# EAGLE board Adapter-IO4-test_array (EAGLE 7.7.0)
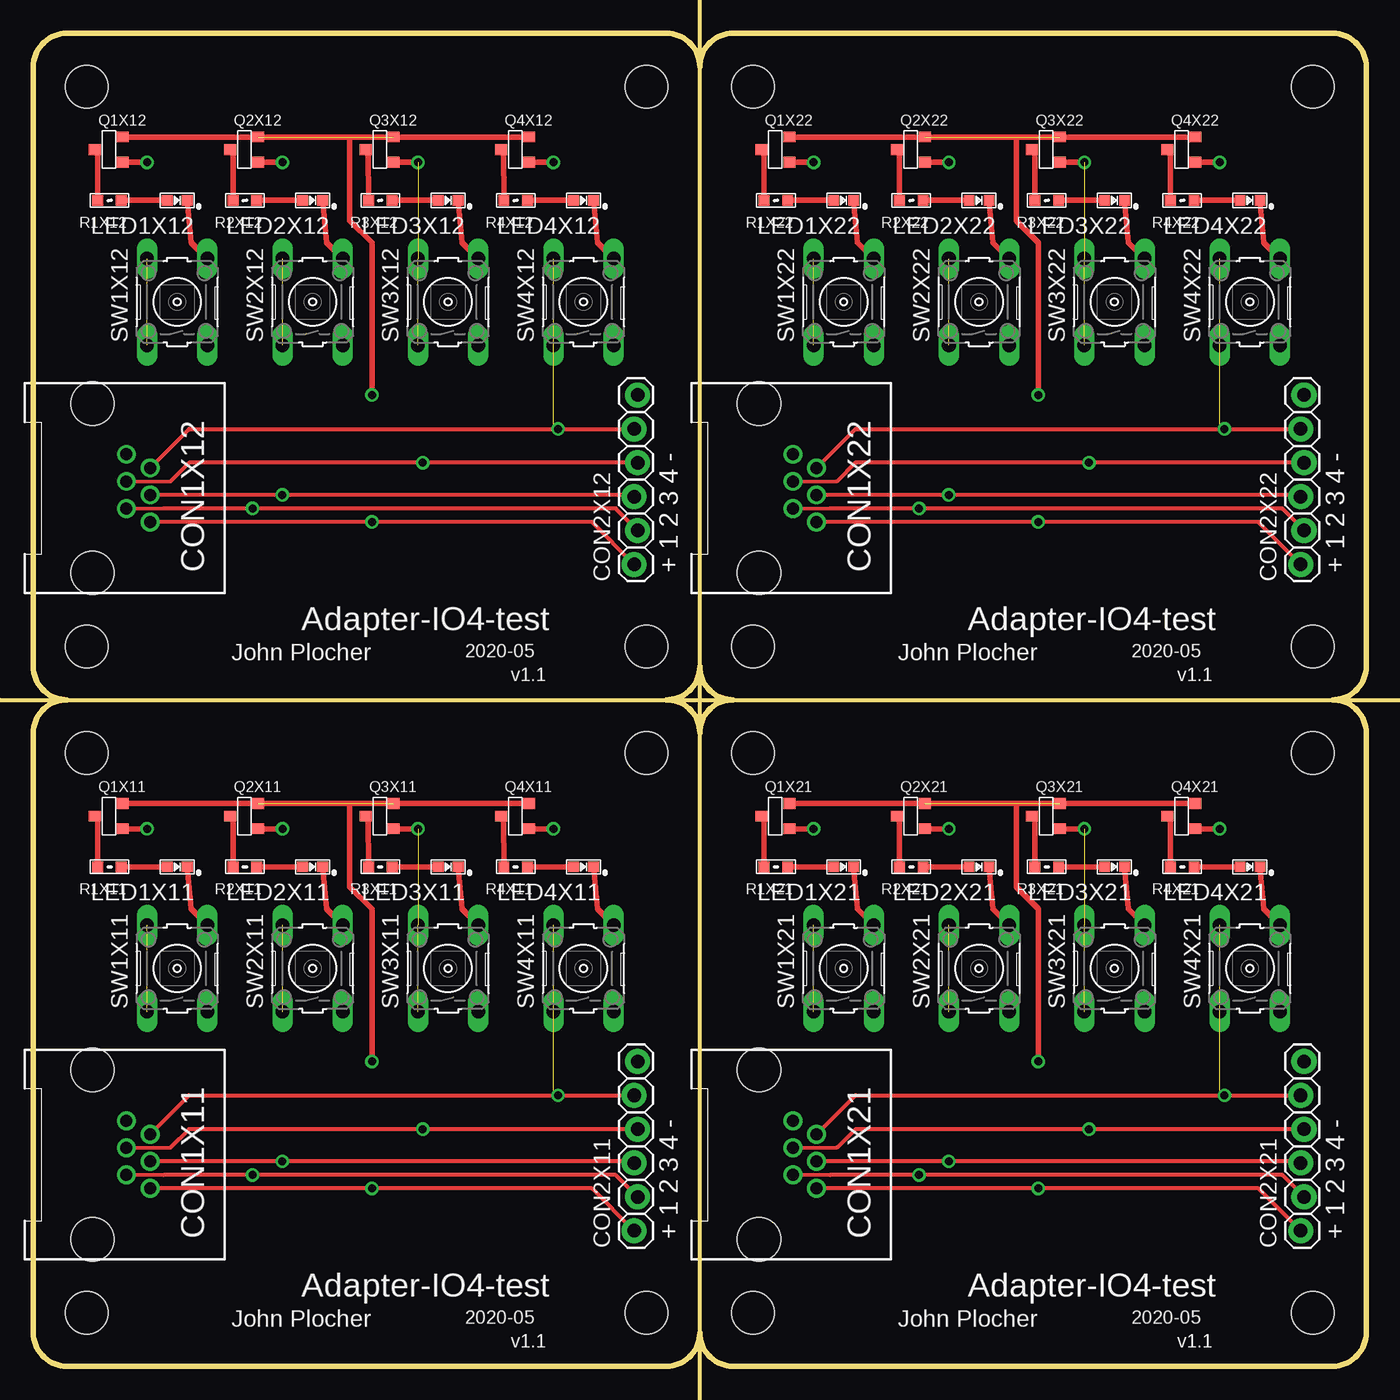
[diagram p0: board, top side]
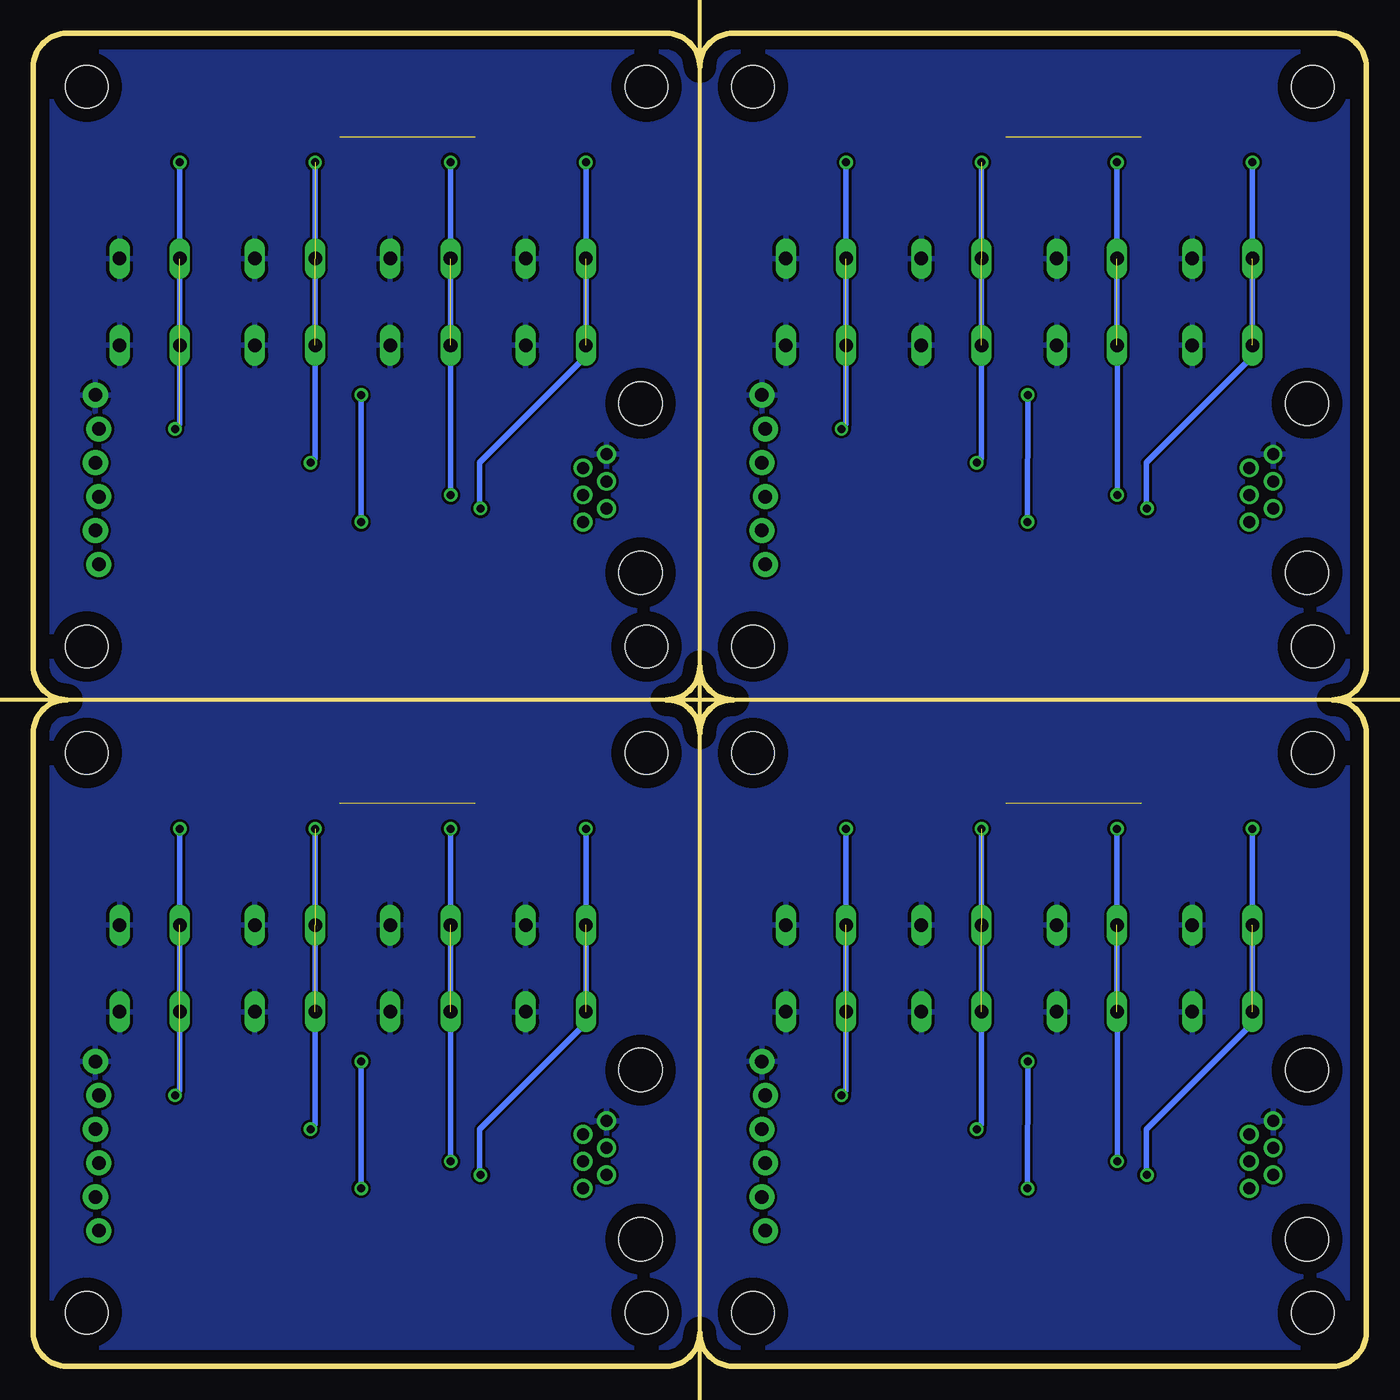
[diagram p1: board, bottom side, seen from below]

Size 100 x 100 mm. Coordinates in mm from the lower left corner, seen from the top.
Outline: 0,2.5 0,47.5 arc-90 2.5,50 arc-90 0,52.5 0,97.5 arc-90 2.5,100 47.5,100 arc-90 50,97.5 arc-90 52.5,100 97.5,100 arc-90 100,97.5 100,52.5 arc-90 97.5,50 arc-90 100,47.5 100,2.5 arc-90 97.5,0 52.5,0 arc-90 50,2.5 arc-90 47.5,0 2.5,0 arc-90 0,2.5
Outline: 50,52.5 arc-90 47.5,50 arc-90 50,47.5 arc-90 52.5,50 arc-90 50,52.5
Copper layers (1*16): Top 0.035mm / dielectric 1.5mm / Bottom 0.035mm
Design rules "default": minimum track width 10mil, minimum drill 0.6mm, track to track 8mil, track to pad 8mil, pad to pad 8mil, via to via 8mil, smd to smd 8mil, copper to edge 40mil, drill to drill 8mil, minimum pad ring 10mil, minimum via ring 8mil, stop-mask expansion 4mil, vias tented up to drill 0mil, thermal gap 10mil
Holes 3.2 mm at 46,46 4,4 46,4 4,46 46,96 4,54 46,54 4,96 96,46 54,4 96,4 54,46 96,96 54,54 96,54 54,96 4,96 46,96 54,96 96,96 96,54 54,54 46,54 4,54 4,46 46,46 54,46 96,46 96,4 54,4 46,4 4,4
Milling: 2 lines

## Footprints (pad centres in the part's own frame; a part is rotated, then mirrored left to right if it is on the bottom)
RJ25-INVERTED = drill 0.9 pad 1.4: 1 2.54,4.318; 2 1.524,2.54; 3 0.508,4.318; 4 -0.508,2.54; 5 -1.524,4.318; 6 -2.54,2.54 | hole 3.251: -6.35,0; 6.35,0
1X06_LOCK = drill 1.016 pad 1.88: 1 0,0; 2 2.54,-0.254; 3 5.08,0; 4 7.62,-0.254; 5 10.16,0; 6 12.7,-0.254
0603-LED = smd 0.8 x 0.8: A 0.75,0; C -0.75,0
SOT23-3 = smd 0.9 x 0.8: 1 1,-0.95; 2 1,0.95; 3 -1.1,0
0603-RES = smd 0.813 x 0.813: 1 -0.889,0; 2 0.889,0
B3F-10XX = drill 1.016 long: 1 -3.251,2.261; 2 3.251,2.261; 3 -3.251,-2.261; 4 3.251,-2.261

## Placement (x,y rotation side)
CON1X11  RJ12/6  [RJ25-INVERTED]  4.45,15.88 270 top
CON1X12  RJ12/6  [RJ25-INVERTED]  4.45,65.88 270 top
CON1X21  RJ12/6  [RJ25-INVERTED]  54.45,15.88 270 top
CON1X22  RJ12/6  [RJ25-INVERTED]  54.45,65.88 270 top
CON2X11  0.100  [1X06_LOCK]  45.09,10.16 90 top
CON2X12  0.100  [1X06_LOCK]  45.09,60.16 90 top
CON2X21  0.100  [1X06_LOCK]  95.08,10.16 90 top
CON2X22  0.100  [1X06_LOCK]  95.08,60.16 90 top
LED1X11  G  [0603-LED]  10.79,37.47 180 top
LED1X12  G  [0603-LED]  10.79,87.47 180 top
LED1X21  G  [0603-LED]  60.8,37.47 180 top
LED1X22  G  [0603-LED]  60.8,87.47 180 top
LED2X11  G  [0603-LED]  20.95,37.47 180 top
LED2X12  G  [0603-LED]  20.95,87.47 180 top
LED2X21  G  [0603-LED]  70.95,37.47 180 top
LED2X22  G  [0603-LED]  70.95,87.47 180 top
LED3X11  G  [0603-LED]  31.11,37.47 180 top
LED3X12  G  [0603-LED]  31.11,87.47 180 top
LED3X21  G  [0603-LED]  81.11,37.47 180 top
LED3X22  G  [0603-LED]  81.11,87.47 180 top
LED4X11  G  [0603-LED]  41.27,37.47 180 top
LED4X12  G  [0603-LED]  41.27,87.47 180 top
LED4X21  G  [0603-LED]  91.28,37.47 180 top
LED4X22  G  [0603-LED]  91.28,87.47 180 top
Q1X11  p-fet  [SOT23-3]  5.71,41.27 0 top
Q1X12  p-fet  [SOT23-3]  5.71,91.28 0 top
Q1X21  p-fet  [SOT23-3]  55.72,41.27 0 top
Q1X22  p-fet  [SOT23-3]  55.72,91.28 0 top
Q2X11  p-fet  [SOT23-3]  15.88,41.27 0 top
Q2X12  p-fet  [SOT23-3]  15.88,91.28 0 top
Q2X21  p-fet  [SOT23-3]  65.88,41.27 0 top
Q2X22  p-fet  [SOT23-3]  65.88,91.28 0 top
Q3X11  p-fet  [SOT23-3]  26.04,41.27 0 top
Q3X12  p-fet  [SOT23-3]  26.04,91.28 0 top
Q3X21  p-fet  [SOT23-3]  76.03,41.27 0 top
Q3X22  p-fet  [SOT23-3]  76.03,91.28 0 top
Q4X11  p-fet  [SOT23-3]  36.2,41.27 0 top
Q4X12  p-fet  [SOT23-3]  36.2,91.28 0 top
Q4X21  p-fet  [SOT23-3]  86.19,41.27 0 top
Q4X22  p-fet  [SOT23-3]  86.19,91.28 0 top
R1X11  2k0  [0603-RES]  5.71,37.47 180 top
R1X12  2k0  [0603-RES]  5.71,87.47 180 top
R1X21  2k0  [0603-RES]  55.72,37.47 180 top
R1X22  2k0  [0603-RES]  55.72,87.47 180 top
R2X11  2k0  [0603-RES]  15.88,37.47 180 top
R2X12  2k0  [0603-RES]  15.88,87.47 180 top
R2X21  2k0  [0603-RES]  65.88,37.47 180 top
R2X22  2k0  [0603-RES]  65.88,87.47 180 top
R3X11  2k0  [0603-RES]  26.04,37.47 180 top
R3X12  2k0  [0603-RES]  26.04,87.47 180 top
R3X21  2k0  [0603-RES]  76.03,37.47 180 top
R3X22  2k0  [0603-RES]  76.03,87.47 180 top
R4X11  2k0  [0603-RES]  36.2,37.47 180 top
R4X12  2k0  [0603-RES]  36.2,87.47 180 top
R4X21  2k0  [0603-RES]  86.19,37.47 180 top
R4X22  2k0  [0603-RES]  86.19,87.47 180 top
SW1X11  SPST-MOM  [B3F-10XX]  10.79,29.84 90 top
SW1X12  SPST-MOM  [B3F-10XX]  10.79,79.84 90 top
SW1X21  SPST-MOM  [B3F-10XX]  60.8,29.84 90 top
SW1X22  SPST-MOM  [B3F-10XX]  60.8,79.84 90 top
SW2X11  SPST-MOM  [B3F-10XX]  20.95,29.84 90 top
SW2X12  SPST-MOM  [B3F-10XX]  20.95,79.84 90 top
SW2X21  SPST-MOM  [B3F-10XX]  70.95,29.84 90 top
SW2X22  SPST-MOM  [B3F-10XX]  70.95,79.84 90 top
SW3X11  SPST-MOM  [B3F-10XX]  31.11,29.84 90 top
SW3X12  SPST-MOM  [B3F-10XX]  31.11,79.84 90 top
SW3X21  SPST-MOM  [B3F-10XX]  81.11,29.84 90 top
SW3X22  SPST-MOM  [B3F-10XX]  81.11,79.84 90 top
SW4X11  SPST-MOM  [B3F-10XX]  41.27,29.84 90 top
SW4X12  SPST-MOM  [B3F-10XX]  41.27,79.84 90 top
SW4X21  SPST-MOM  [B3F-10XX]  91.28,29.84 90 top
SW4X22  SPST-MOM  [B3F-10XX]  91.28,79.84 90 top

## Library data of the parts
CON1X11 CON1X12 CON1X21 CON1X22 CON2X11 CON2X12 CON2X21 CON2X22 LED1X11 LED1X12 LED1X21 LED1X22 LED2X11 LED2X12 LED2X21 LED2X22 LED3X11 LED3X12 LED3X21 LED3X22 LED4X11 LED4X12 LED4X21 LED4X22 Q1X11 Q1X12 Q1X21 Q1X22 Q2X11 Q2X12 Q2X21 Q2X22 Q3X11 Q3X12 Q3X21 Q3X22 Q4X11 Q4X12 Q4X21 Q4X22 R1X11 R1X12 R1X21 R1X22 R2X11 R2X12 R2X21 R2X22 R3X11 R3X12 R3X21 R3X22 R4X11 R4X12 R4X21 R4X22 SW1X11 SW1X12 SW1X21 SW1X22 SW2X11 SW2X12 SW2X21 SW2X22 SW3X11 SW3X12 SW3X21 SW3X22 SW4X11 SW4X12 SW4X21 SW4X22 = SPCoast

## Nets
GNDX11: CON1X11.6 CON2X11.6 LED1X11.C LED2X11.C LED3X11.C LED4X11.C SW1X11.3 SW1X11.4 SW2X11.3 SW2X11.4 SW3X11.3 SW3X11.4 SW4X11.3 SW4X11.4
GNDX12: CON1X12.6 CON2X12.6 LED1X12.C LED2X12.C LED3X12.C LED4X12.C SW1X12.3 SW1X12.4 SW2X12.3 SW2X12.4 SW3X12.3 SW3X12.4 SW4X12.3 SW4X12.4
GNDX21: CON1X21.6 CON2X21.6 LED1X21.C LED2X21.C LED3X21.C LED4X21.C SW1X21.3 SW1X21.4 SW2X21.3 SW2X21.4 SW3X21.3 SW3X21.4 SW4X21.3 SW4X21.4
GNDX22: CON1X22.6 CON2X22.6 LED1X22.C LED2X22.C LED3X22.C LED4X22.C SW1X22.3 SW1X22.4 SW2X22.3 SW2X22.4 SW3X22.3 SW3X22.4 SW4X22.3 SW4X22.4
N$1X11: Q1X11.3 R1X11.2
N$1X12: Q1X12.3 R1X12.2
N$1X21: Q1X21.3 R1X21.2
N$1X22: Q1X22.3 R1X22.2
N$2X11: LED1X11.A R1X11.1
N$2X12: LED1X12.A R1X12.1
N$2X21: LED1X21.A R1X21.1
N$2X22: LED1X22.A R1X22.1
N$3X11: Q2X11.3 R2X11.2
N$3X12: Q2X12.3 R2X12.2
N$3X21: Q2X21.3 R2X21.2
N$3X22: Q2X22.3 R2X22.2
N$4X11: LED2X11.A R2X11.1
N$4X12: LED2X12.A R2X12.1
N$4X21: LED2X21.A R2X21.1
N$4X22: LED2X22.A R2X22.1
N$5X11: Q3X11.3 R3X11.2
N$5X12: Q3X12.3 R3X12.2
N$5X21: Q3X21.3 R3X21.2
N$5X22: Q3X22.3 R3X22.2
N$6X11: LED3X11.A R3X11.1
N$6X12: LED3X12.A R3X12.1
N$6X21: LED3X21.A R3X21.1
N$6X22: LED3X22.A R3X22.1
N$7X11: CON1X11.2 CON2X11.2 Q1X11.1 SW1X11.1 SW1X11.2
N$7X12: CON1X12.2 CON2X12.2 Q1X12.1 SW1X12.1 SW1X12.2
N$7X21: CON1X21.2 CON2X21.2 Q1X21.1 SW1X21.1 SW1X21.2
N$7X22: CON1X22.2 CON2X22.2 Q1X22.1 SW1X22.1 SW1X22.2
N$8X11: CON1X11.3 CON2X11.3 Q2X11.1 SW2X11.1 SW2X11.2
N$8X12: CON1X12.3 CON2X12.3 Q2X12.1 SW2X12.1 SW2X12.2
N$8X21: CON1X21.3 CON2X21.3 Q2X21.1 SW2X21.1 SW2X21.2
N$8X22: CON1X22.3 CON2X22.3 Q2X22.1 SW2X22.1 SW2X22.2
N$9X11: CON1X11.4 CON2X11.4 Q3X11.1 SW3X11.1 SW3X11.2
N$9X12: CON1X12.4 CON2X12.4 Q3X12.1 SW3X12.1 SW3X12.2
N$9X21: CON1X21.4 CON2X21.4 Q3X21.1 SW3X21.1 SW3X21.2
N$9X22: CON1X22.4 CON2X22.4 Q3X22.1 SW3X22.1 SW3X22.2
N$10X11: CON1X11.5 CON2X11.5 Q4X11.1 SW4X11.1 SW4X11.2
N$10X12: CON1X12.5 CON2X12.5 Q4X12.1 SW4X12.1 SW4X12.2
N$10X21: CON1X21.5 CON2X21.5 Q4X21.1 SW4X21.1 SW4X21.2
N$10X22: CON1X22.5 CON2X22.5 Q4X22.1 SW4X22.1 SW4X22.2
N$15X11: Q4X11.3 R4X11.2
N$15X12: Q4X12.3 R4X12.2
N$15X21: Q4X21.3 R4X21.2
N$15X22: Q4X22.3 R4X22.2
N$16X11: LED4X11.A R4X11.1
N$16X12: LED4X12.A R4X12.1
N$16X21: LED4X21.A R4X21.1
N$16X22: LED4X22.A R4X22.1
VCCX11: CON1X11.1 CON2X11.1 Q1X11.2 Q2X11.2 Q3X11.2 Q4X11.2
VCCX12: CON1X12.1 CON2X12.1 Q1X12.2 Q2X12.2 Q3X12.2 Q4X12.2
VCCX21: CON1X21.1 CON2X21.1 Q1X21.2 Q2X21.2 Q3X21.2 Q4X21.2
VCCX22: CON1X22.1 CON2X22.1 Q1X22.2 Q2X22.2 Q3X22.2 Q4X22.2

## Tracks (layer width: path | path; a pad name or v marks a point on that pad's centre or on a via)
GNDX11
  Top 0.406: LED1X11.C 11.85,34.31 SW1X11.4 | LED2X11.C 22,34.31 SW2X11.4 | LED3X11.C 32.16,34.31 SW3X11.4 | LED4X11.C 42.33,34.31 SW4X11.4
  pour Bottom: 0,50 0,0 50,0 50,50
GNDX12
  Top 0.406: LED1X12.C 11.85,84.31 SW1X12.4 | LED2X12.C 22,84.31 SW2X12.4 | LED3X12.C 32.16,84.31 SW3X12.4 | LED4X12.C 42.33,84.31 SW4X12.4
  pour Bottom: 0,100 0,50 50,50 50,100
GNDX21
  Top 0.406: LED1X21.C 61.84,34.31 SW1X21.4 | LED2X21.C 72,34.31 SW2X21.4 | LED3X21.C 82.17,34.31 SW3X21.4 | LED4X21.C 92.33,34.31 SW4X21.4
  pour Bottom: 50,50 50,0 100,0 100,50
GNDX22
  Top 0.406: LED1X22.C 61.84,84.31 SW1X22.4 | LED2X22.C 72,84.31 SW2X22.4 | LED3X22.C 82.17,84.31 SW3X22.4 | LED4X22.C 92.33,84.31 SW4X22.4
  pour Bottom: 50,100 50,50 100,50 100,100
N$1X11
  Top 0.406: R1X11.2 4.82,41.08 Q1X11.3
N$1X12
  Top 0.406: R1X12.2 4.82,91.08 Q1X12.3
N$1X21
  Top 0.406: R1X21.2 54.81,41.08 Q1X21.3
N$1X22
  Top 0.406: R1X22.2 54.81,91.08 Q1X22.3
N$2X11
  Top 0.406: R1X11.1 LED1X11.A
N$2X12
  Top 0.406: R1X12.1 LED1X12.A
N$2X21
  Top 0.406: R1X21.1 LED1X21.A
N$2X22
  Top 0.406: R1X22.1 LED1X22.A
N$3X11
  Top 0.406: R2X11.2 14.97,41.08 Q2X11.3
N$3X12
  Top 0.406: R2X12.2 14.97,91.08 Q2X12.3
N$3X21
  Top 0.406: R2X21.2 64.97,41.08 Q2X21.3
N$3X22
  Top 0.406: R2X22.2 64.97,91.08 Q2X22.3
N$4X11
  Top 0.406: R2X11.1 LED2X11.A
N$4X12
  Top 0.406: R2X12.1 LED2X12.A
N$4X21
  Top 0.406: R2X21.1 LED2X21.A
N$4X22
  Top 0.406: R2X22.1 LED2X22.A
N$5X11
  Top 0.406: R3X11.2 25.14,41.08 Q3X11.3
N$5X12
  Top 0.406: R3X12.2 25.14,91.08 Q3X12.3
N$5X21
  Top 0.406: R3X21.2 75.14,41.08 Q3X21.3
N$5X22
  Top 0.406: R3X22.2 75.14,91.08 Q3X22.3
N$6X11
  Top 0.406: R3X11.1 LED3X11.A
N$6X12
  Top 0.406: R3X12.1 LED3X12.A
N$6X21
  Top 0.406: R3X21.1 LED3X21.A
N$6X22
  Top 0.406: R3X22.1 LED3X22.A
N$7X11  (via drill 0.6 pad 0.9)  (1 unrouted)
  Top 0.254: 9.78,14.35 CON1X11.2
  Top 0.305: CON2X11.2 43.69,14.35 v16.45,14.35 9.78,14.35
  Top 0.406: v8.48,26.54 SW1X11.1 | v8.53,40.33 Q1X11.1
  Bottom 0.406: SW1X11.1 v8.53,40.33 | v8.48,26.54 8.48,25.81 16.51,17.78 16.51,14.41 v16.45,14.35
N$7X12  (via drill 0.6 pad 0.9)  (1 unrouted)
  Top 0.254: 9.78,64.35 CON1X12.2
  Top 0.305: CON2X12.2 43.69,64.35 v16.45,64.35 9.78,64.35
  Top 0.406: v8.48,76.54 SW1X12.1 | v8.53,90.33 Q1X12.1
  Bottom 0.406: SW1X12.1 v8.53,90.33 | v8.48,76.54 8.48,75.81 16.51,67.78 16.51,64.41 v16.45,64.35
N$7X21  (via drill 0.6 pad 0.9)  (1 unrouted)
  Top 0.254: 59.78,14.35 CON1X21.2
  Top 0.305: CON2X21.2 93.69,14.35 v66.45,14.35 59.78,14.35
  Top 0.406: v58.48,26.54 SW1X21.1 | v58.53,40.33 Q1X21.1
  Bottom 0.406: SW1X21.1 v58.53,40.33 | v58.48,26.54 58.48,25.81 66.51,17.78 66.51,14.41 v66.45,14.35
N$7X22  (via drill 0.6 pad 0.9)  (1 unrouted)
  Top 0.254: 59.78,64.35 CON1X22.2
  Top 0.305: CON2X22.2 93.69,64.35 v66.45,64.35 59.78,64.35
  Top 0.406: v58.48,76.54 SW1X22.1 | v58.53,90.33 Q1X22.1
  Bottom 0.406: SW1X22.1 v58.53,90.33 | v58.48,76.54 58.48,75.81 66.51,67.78 66.51,64.41 v66.45,64.35
N$8X11  (via drill 0.6 pad 0.9)  (1 unrouted)
  Top 0.305: CON2X11.3 44.32,15.37 v18.68,15.37 CON1X11.3
  Top 0.406: v18.69,40.33 Q2X11.1
  Bottom 0.406: v18.69,40.33 SW2X11.1 v18.68,15.37
N$8X12  (via drill 0.6 pad 0.9)  (1 unrouted)
  Top 0.305: CON2X12.3 44.32,65.37 v18.68,65.37 CON1X12.3
  Top 0.406: v18.69,90.33 Q2X12.1
  Bottom 0.406: v18.69,90.33 SW2X12.1 v18.68,65.37
N$8X21  (via drill 0.6 pad 0.9)  (1 unrouted)
  Top 0.305: CON2X21.3 94.32,15.37 v68.68,15.37 CON1X21.3
  Top 0.406: v68.69,40.33 Q2X21.1
  Bottom 0.406: v68.69,40.33 SW2X21.1 v68.68,15.37
N$8X22  (via drill 0.6 pad 0.9)  (1 unrouted)
  Top 0.305: CON2X22.3 94.32,65.37 v68.68,65.37 CON1X22.3
  Top 0.406: v68.69,90.33 Q2X22.1
  Bottom 0.406: v68.69,90.33 SW2X22.1 v68.68,65.37
N$9X11  (via drill 0.6 pad 0.9)  (2 unrouted)
  Top 0.254: 10.29,16.38 CON1X11.4
  Top 0.305: CON2X11.4 v29.21,17.78 11.68,17.78 10.29,16.38
  Top 0.406: v28.85,40.33 Q3X11.1
  Bottom 0.406: v28.85,40.33 28.85,18.14 v29.21,17.78
N$9X12  (via drill 0.6 pad 0.9)  (2 unrouted)
  Top 0.254: 10.29,66.38 CON1X12.4
  Top 0.305: CON2X12.4 v29.21,67.78 11.68,67.78 10.29,66.38
  Top 0.406: v28.85,90.33 Q3X12.1
  Bottom 0.406: v28.85,90.33 28.85,68.14 v29.21,67.78
N$9X21  (via drill 0.6 pad 0.9)  (2 unrouted)
  Top 0.254: 60.29,16.38 CON1X21.4
  Top 0.305: CON2X21.4 v79.21,17.78 61.68,17.78 60.29,16.38
  Top 0.406: v78.85,40.33 Q3X21.1
  Bottom 0.406: v78.85,40.33 78.85,18.14 v79.21,17.78
N$9X22  (via drill 0.6 pad 0.9)  (2 unrouted)
  Top 0.254: 60.29,66.38 CON1X22.4
  Top 0.305: CON2X22.4 v79.21,67.78 61.68,67.78 60.29,66.38
  Top 0.406: v78.85,90.33 Q3X22.1
  Bottom 0.406: v78.85,90.33 78.85,68.14 v79.21,67.78
N$10X11  (via drill 0.6 pad 0.9)  (2 unrouted)
  Top 0.305: CON1X11.5 11.68,20.32 v39.37,20.32 CON2X11.5
  Top 0.406: v39.01,40.33 Q4X11.1
  Bottom 0.406: v39.37,20.32 39.01,20.68 v39.01,40.33
N$10X12  (via drill 0.6 pad 0.9)  (2 unrouted)
  Top 0.305: CON1X12.5 11.68,70.32 v39.37,70.32 CON2X12.5
  Top 0.406: v39.01,90.33 Q4X12.1
  Bottom 0.406: v39.37,70.32 39.01,70.68 v39.01,90.33
N$10X21  (via drill 0.6 pad 0.9)  (2 unrouted)
  Top 0.305: CON1X21.5 61.68,20.32 v89.37,20.32 CON2X21.5
  Top 0.406: v89.01,40.33 Q4X21.1
  Bottom 0.406: v89.37,20.32 89.01,20.68 v89.01,40.33
N$10X22  (via drill 0.6 pad 0.9)  (2 unrouted)
  Top 0.305: CON1X22.5 61.68,70.32 v89.37,70.32 CON2X22.5
  Top 0.406: v89.01,90.33 Q4X22.1
  Bottom 0.406: v89.37,70.32 89.01,70.68 v89.01,90.33
N$15X11
  Top 0.406: R4X11.2 35.3,41.08 Q4X11.3
N$15X12
  Top 0.406: R4X12.2 35.3,91.08 Q4X12.3
N$15X21
  Top 0.406: R4X21.2 85.3,41.08 Q4X21.3
N$15X22
  Top 0.406: R4X22.2 85.3,91.08 Q4X22.3
N$16X11
  Top 0.406: R4X11.1 LED4X11.A
N$16X12
  Top 0.406: R4X12.1 LED4X12.A
N$16X21
  Top 0.406: R4X21.1 LED4X21.A
N$16X22
  Top 0.406: R4X22.1 LED4X22.A
VCCX11  (via drill 0.6 pad 0.9)  (2 unrouted)
  Top 0.305: CON2X11.1 41.91,13.34 v25.4,13.34 CON1X11.1
  Top 0.406: Q1X11.2 23.75,42.23 | 23.75,42.23 Q4X11.2 | v25.4,22.86 25.4,34.29 23.75,35.94 23.75,42.23
  Bottom 0.406: v25.4,13.34 v25.4,22.86
VCCX12  (via drill 0.6 pad 0.9)  (2 unrouted)
  Top 0.305: CON2X12.1 41.91,63.34 v25.4,63.34 CON1X12.1
  Top 0.406: Q1X12.2 23.75,92.22 | 23.75,92.22 Q4X12.2 | v25.4,72.86 25.4,84.29 23.75,85.94 23.75,92.22
  Bottom 0.406: v25.4,63.34 v25.4,72.86
VCCX21  (via drill 0.6 pad 0.9)  (2 unrouted)
  Top 0.305: CON2X21.1 91.91,13.34 v75.4,13.34 CON1X21.1
  Top 0.406: Q1X21.2 73.75,42.23 | 73.75,42.23 Q4X21.2 | v75.4,22.86 75.4,34.29 73.75,35.94 73.75,42.23
  Bottom 0.406: v75.4,13.34 v75.4,22.86
VCCX22  (via drill 0.6 pad 0.9)  (2 unrouted)
  Top 0.305: CON2X22.1 91.91,63.34 v75.4,63.34 CON1X22.1
  Top 0.406: Q1X22.2 73.75,92.22 | 73.75,92.22 Q4X22.2 | v75.4,72.86 75.4,84.29 73.75,85.94 73.75,92.22
  Bottom 0.406: v75.4,63.34 v75.4,72.86

## Text on the board
tPlace: + 1 2 3 4 - | + 1 2 3 4 - | Adapter-IO4-test | Adapter-IO4-test | John Plocher | 2020-05 | John Plocher | 2020-05 | v1.1 | v1.1 | + 1 2 3 4 - | + 1 2 3 4 - | Adapter-IO4-test | Adapter-IO4-test | John Plocher | 2020-05 | John Plocher | 2020-05 | v1.1 | v1.1
Milling: V-Score | V-Score
_tNames: LED1 | LED2 | LED3 | LED4 | LED1 | LED2 | LED3 | LED4 | SW1 | SW2 | SW3 | SW4 | SW1 | SW2 | SW3 | SW4 | CON1 | CON1 | CON2 | CON2 | LED1 | LED2 | LED3 | LED4 | LED1 | LED2 | LED3 | LED4 | SW1 | SW2 | SW3 | SW4 | SW1 | SW2 | SW3 | SW4 | CON1 | CON1 | CON2 | CON2